# Altium PCB Mounting_PCB_A.PcbDoc
Units mil, origin at the board's own origin, x right, y up, seen from the top; angles counter-clockwise.
Board outline 6000 x 4000 mil, 4 copper layers (Top Layer, Mid-Layer 1, Mid-Layer 2, Bottom Layer); 44 components, 24 nets, 150 pads, 4 vias.
Unrouted connection lines stored in the file: 61.
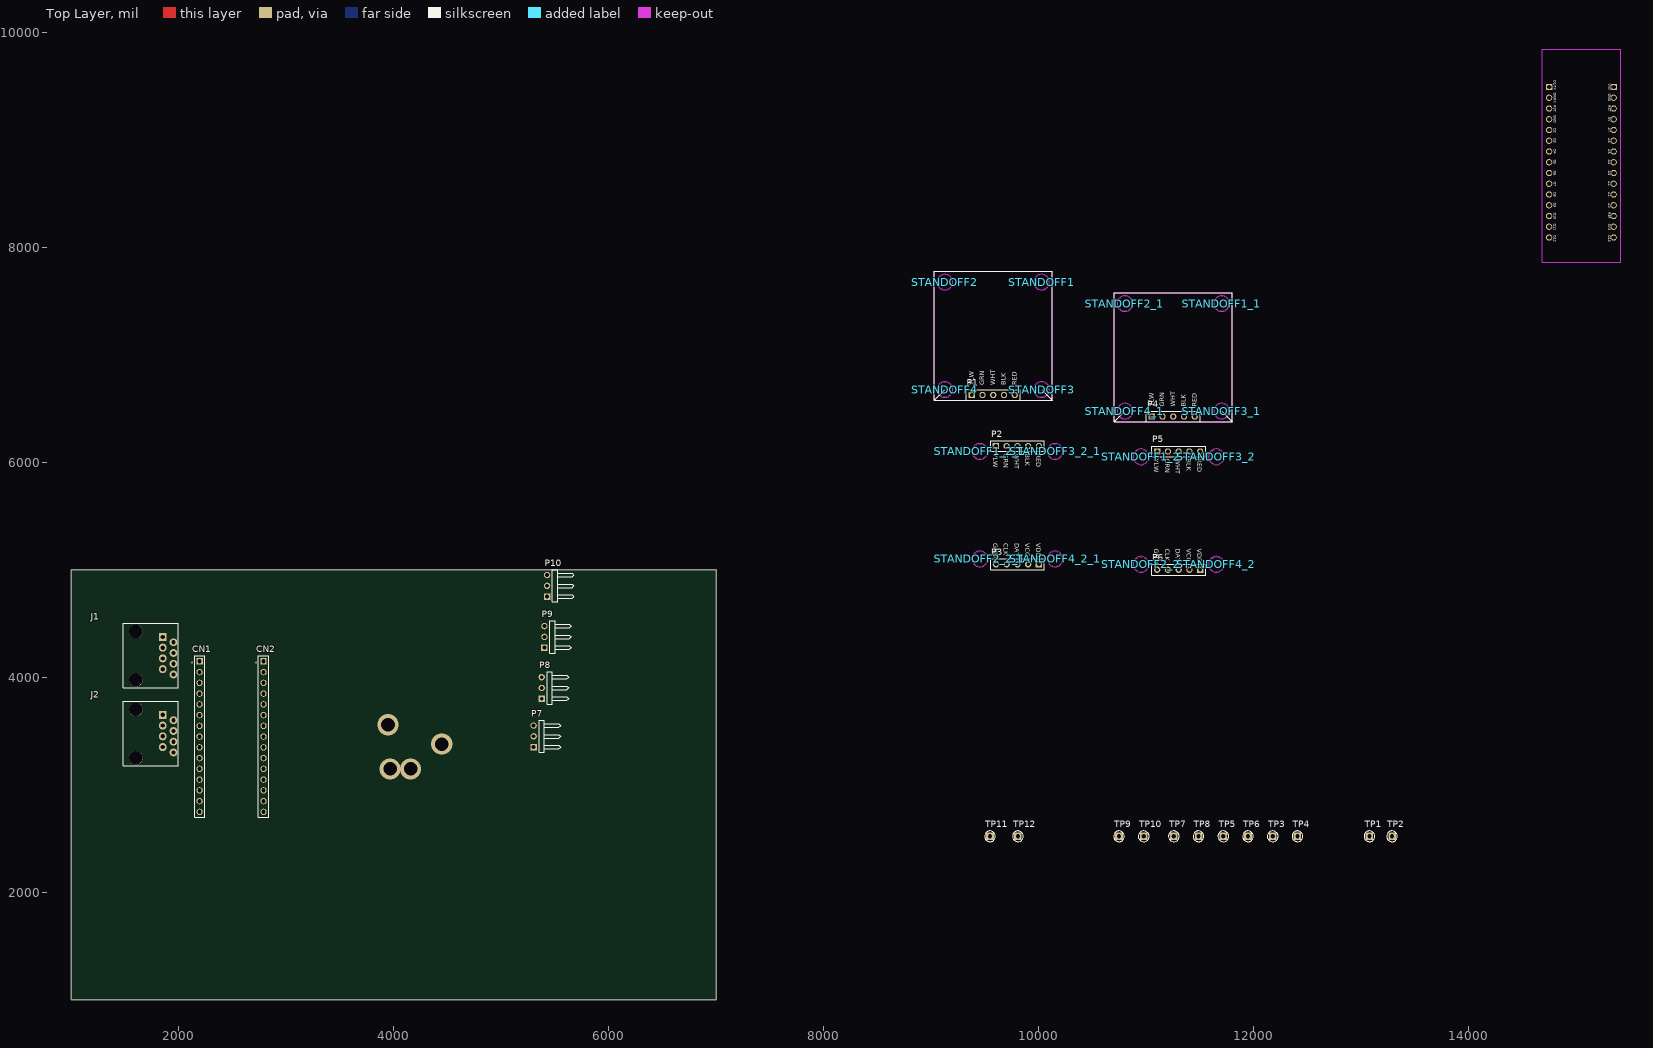
[diagram p0: Top Layer view]
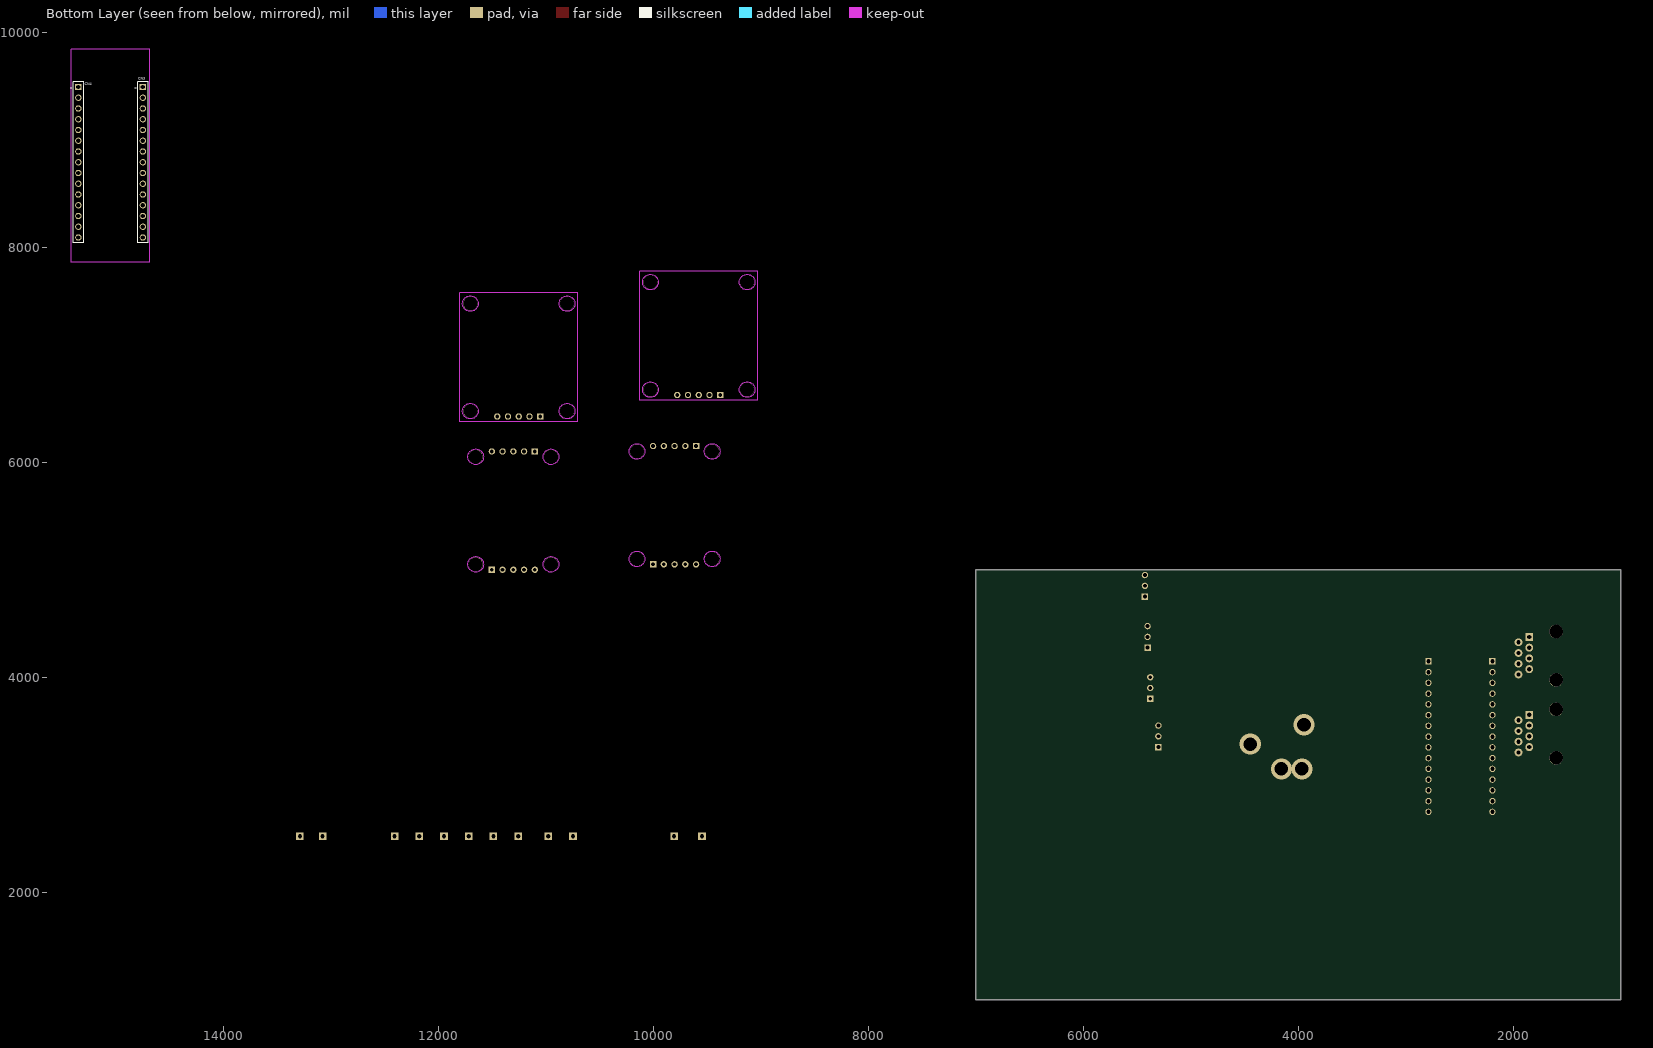
[diagram p1: Bottom Layer view, seen from below]

## Layer stack, top to bottom
Top Solder: solder mask 0.4, Solder Resist, Dk 3.5
Top Layer: signal copper 1.4
Dielectric 1: dielectric 12.6, FR-4, Dk 4.8
Mid-Layer 1: signal copper 1.4
Dielectric3: dielectric 12.6, FR-4, Dk 4.8
Mid-Layer 2: signal copper 1.4
Dielectric2: dielectric 12.6, FR-4, Dk 4.8
Bottom Layer: signal copper 1.4
Bottom Solder: solder mask 0.4, Solder Resist, Dk 3.5

## Board outline
1000,1000 7000,1000 7000,5000 1000,5000

## Design rules (kind name [scope] priority, off if disabled: settings)
Clearance [All] p1: gap=10
PolygonConnect [All] p1: connectstyle=Relief reliefconductorwidth=10 reliefentries=4 polygonreliefangle="90 Angle" airgapwidth=10
RoomDefinition Mounting_PCB_A [InComponentClass('Mounting_PCB_A')] p1: confinementstyle=ConfineIn formatcopy=TRUE lockcomponents=FALSE outline 7045,1060 14075,1060 14075,2680 7045,2680
RoutingVias [All] p1: holewidth=28 width=50 viastyle="Through Hole" minholewidth=28 minwidth=50 maxholewidth=28 maxwidth=50
SolderMaskExpansion [All] p1: expansion=4
Width [All] p1: maxlimit=10 minlimit=10 preferedwidth=10
30 further rules are at their usual default settings.

## Classes and differential pairs
component class Mounting_PCB_A: CN1 CN2 J1 J2 P1 P2 P3 P5 P7 P8 P9 P10 TP1 TP2 TP3 TP4 TP5 TP6 TP7 TP8 TP9 TP10 TP11 TP12

## Components (designator, comment, footprint, x,y, rotation, side; value= is the part's Value field where it differs from the comment)
CN1 "Header 15X1_male" HDR_1x15_2R54_V_F 2192.5,4147.44 r270 top
CN2 "Header 15X1_male" HDR_1x15_2R54_V_F 2787.5,4147.44 r270 top
CN3 "Header 15X1_male" HDR_1x15_2R54_V_F 14746,9490 r270 bottom locked
CN4 "Header 15X1_male" HDR_1x15_2R54_V_F 15346,9490 r270 bottom locked
J1 "RJ45-8" RJ45-8 1600,4200 r270 top
J2 "RJ45-8" RJ45-8 1600,3475 r270 top
P1 "Header 5" HDR1X5 9375,6625 r0 top
P2 "Header 5" HDR1X5 9600,6150 r0 top
P3 "Header 5" HDR1X5 10000,5050 r180 top
P4 "Header 5" HDR1X5 11050,6425 r0 top
P5 "Header 5" HDR1X5 11100,6100 r0 top
P6 "Header 5" HDR1X5 11500,5000 r180 top
P7 "Header 3H" HDR1X3H 5300,3350 r90 top
P8 "Header 3H" HDR1X3H 5375,3800 r90 top
P9 "Header 3H" HDR1X3H 5400,4275 r90 top
P10 "Header 3H" HDR1X3H 5425,4750 r90 top
STANDOFF1 "" STAND-OFF 10025,7675 r180 top
STANDOFF1_1 "" STAND-OFF 11700,7475 r180 top (schematic designator STANDOFF1)
STANDOFF1_2 "" STAND-OFF 10950,6050 r270 top (schematic designator STANDOFF1)
STANDOFF1_2_1 "" STAND-OFF 9450,6100 r270 top (schematic designator STANDOFF1)
STANDOFF2 "" STAND-OFF 9125,7675 r180 top
STANDOFF2_1 "" STAND-OFF 10800,7475 r180 top (schematic designator STANDOFF2)
STANDOFF2_2 "" STAND-OFF 10950,5050 r270 top (schematic designator STANDOFF2)
STANDOFF2_2_1 "" STAND-OFF 9450,5100 r270 top (schematic designator STANDOFF2)
STANDOFF3 "" STAND-OFF 10025,6675 r180 top
STANDOFF3_1 "" STAND-OFF 11700,6475 r180 top (schematic designator STANDOFF3)
STANDOFF3_2 "" STAND-OFF 11650,6050 r270 top (schematic designator STANDOFF3)
STANDOFF3_2_1 "" STAND-OFF 10150,6100 r270 top (schematic designator STANDOFF3)
STANDOFF4 "" STAND-OFF 9125,6675 r180 top
STANDOFF4_1 "" STAND-OFF 10800,6475 r180 top (schematic designator STANDOFF4)
STANDOFF4_2 "" STAND-OFF 11650,5050 r270 top (schematic designator STANDOFF4)
STANDOFF4_2_1 "" STAND-OFF 10150,5100 r270 top (schematic designator STANDOFF4)
TP1 "TESTPOINT" TP70 13075,2520 r0 top
TP2 "TESTPOINT" TP70 13285,2520 r0 top
TP3 "TESTPOINT" TP70 12175,2520 r0 top
TP4 "TESTPOINT" TP70 12405,2520 r0 top
TP5 "TESTPOINT" TP70 11715,2520 r0 top
TP6 "TESTPOINT" TP70 11945,2520 r0 top
TP7 "TESTPOINT" TP70 11255,2520 r0 top
TP8 "TESTPOINT" TP70 11485,2520 r0 top
TP9 "TESTPOINT" TP70 10745,2520 r0 top
TP10 "TESTPOINT" TP70 10975,2520 r90 top
TP11 "TESTPOINT" TP70 9545,2520 r90 top
TP12 "TESTPOINT" TP70 9805,2520 r90 top

## Footprints (in the part's own frame and the unit in brackets; to place one, negate y for a bottom-side part, rotate by r counter-clockwise, add the part's x,y. Pads: shape width x height; smd on the part's side, far side on the other; paste and mask are expansions set on the pad)
HDR1X3H [mm] "Connector; Header; 3 Position; Right Angle"
  rect 1.5x1.5 hole 0.9: 1(0,0)
  round 1.5 hole 0.9: 2(2.54,0) 3(5.08,0)
  silkscreen extent -1.27,-6.35 6.35,-1.27
HDR1X5 [mm] "Connector; Header; 5 Position"
  rect 1.5x1.5 hole 0.9: 1(0,0)
  round 1.5 hole 0.9: 2(2.54,0) 3(5.08,0) 4(7.62,0) 5(10.16,0)
  silkscreen extent -1.27,-1.27 11.43,1.27
HDR_1x15_2R54_V_F [mm] "Male Header, Pitch 2.54mm, 15x1 Position, Mated Height 6mm, Tail Length 3mm"
  rect 1.5x1.5 hole 1.02: 1(0,0)
  round 1.5 hole 1.02: 2(2.54,0) 3(5.08,0) 4(7.62,0) 5(10.16,0) 6(12.7,0) 7(15.24,0) 8(17.78,0) 9(20.32,0) 10(22.86,0) 11(25.4,0) 12(27.94,0) 13(30.48,0) 14(33.02,0) 15(35.56,0)
  silkscreen extent -1.27,-1.85 36.83,1.27, body extent -1.27,-1.27 36.83,1.27, height 12.7
RJ45-8 [mil]
  round 125.98 hole 125.98: 1(-225,0) 1(225,0)
  rect 74x74 hole 39.37: 1(-175,250)
  round 74 hole 39.37: 2(-125,350) 3(-75,250) 4(-25,350) 5(25,250) 6(75,350) 7(125,250) 8(175,350)
  silkscreen extent -300,-118 300,394
STAND-OFF [mil] "STAND-OFF"
  round 130 hole 130: 1(0,0)
  Top Layer keep-out lines w8: 0,73 ccw(c0,0) 0,-73 ccw(c0,0) 0,73
  Bottom Layer keep-out lines w8: 0,73 ccw(c0,0) 0,-73 ccw(c0,0) 0,73
TP70 [mil]
  rect 70x70 hole 40: 1(0,0)
  silkscreen extent -50,-50 50,50

## Part data
CN1 CN2 CN3 CN4: library part "Header 15X1_Female_1", "Header, 10-Pin, Single row,female"
P1 P2 P3 P4 P5 P6: "Header, 5-Pin"
P7 P8 P9 P10: "Header, 3-Pin, Right Angle"
STANDOFF1 STANDOFF1_1 STANDOFF1_2 STANDOFF1_2_1 STANDOFF2 STANDOFF2_1 STANDOFF2_2 STANDOFF2_2_1 STANDOFF3 STANDOFF3_1 STANDOFF3_2 STANDOFF3_2_1 STANDOFF4 STANDOFF4_1 STANDOFF4_2 STANDOFF4_2_1: library part STAND-OFF
TP1 TP2 TP3 TP4 TP5 TP6 TP7 TP8 TP9 TP10 TP11 TP12: "Test Point"

## Via types
v1: diameter 196.85, hole 125.98, Top Layer to Bottom Layer, 4 vias

## Nets (pads, with @x,y where several pads share a name; then routed paths per layer and width w, separated by ;. In a path a pad name is that pad's centre, name@x,y a point inside that pad or via, vN(x,y) a via of type N, cw(c..) or ccw(c..) an arc to the next point about the centre after c; other vN are vias at no path point)
+5V: CN2.4 J1.1 J1.2 J1.3 J2.1 J2.2 J2.3 P3.1 P3.2 P6.1 P6.2 P7.2 P8.2 P9.2 P10.2 TP1.1
ADC_A: P3.3 TP2.1
ADC_B: P6.3 TP4.1
ADC_C: CN2.9 P7.1 TP6.1
ADC_D: CN2.8 P8.1 TP8.1
ADC_E: CN2.7 P9.1 TP10.1
ADC_F: CN2.6 P10.1 TP12.1
BLK_B: P4.4 P5.4
BLK_T: P1.4 P2.4
CLK_B: P6.4
CLK_T: P3.4
GND: CN1.4 CN2.2 J1.6 J1.7 J1.8 J2.6 J2.7 J2.8 P3.5 P6.5 P7.3 P8.3 P9.3 P10.3 TP11.1
GRN_B: P4.2 P5.2
GRN_T: P1.2 P2.2
RED_B: P4.5 P5.5
RED_T: P1.5 P2.5
UART1_RX: CN1.2 J1.5 TP9.1
UART1_TX: CN1.1 J1.4 TP7.1
UART2_RX: CN2.10 J2.5 TP5.1
UART2_TX: CN2.5 J2.4 TP3.1
WHT_B: P4.3 P5.3
WHT_T: P1.3 P2.3
YLW_B: P4.1 P5.1
YLW_T: P1.1 P2.1
pads on no net: CN1.3 CN1.5 CN1.6 CN1.7 CN1.8 CN1.9 CN1.10 CN1.11 CN1.12 CN1.13 CN1.14 CN1.15 CN2.1 CN2.3 CN2.11 CN2.12 CN2.13 CN2.14 CN2.15 CN3.1 CN3.2 CN3.3 CN3.4 CN3.5 CN3.6 CN3.7 CN3.8 CN3.9 CN3.10 CN3.11 CN3.12 CN3.13 CN3.14 CN3.15 CN4.1 CN4.2 CN4.3 CN4.4 CN4.5 CN4.6 CN4.7 CN4.8 CN4.9 CN4.10 CN4.11 CN4.12 CN4.13 CN4.14 CN4.15 STANDOFF1.1 STANDOFF1_1.1 STANDOFF1_2.1 STANDOFF1_2_1.1 STANDOFF2.1 STANDOFF2_1.1 STANDOFF2_2.1 STANDOFF2_2_1.1 STANDOFF3.1 STANDOFF3_1.1 STANDOFF3_2.1 STANDOFF3_2_1.1 STANDOFF4.1 STANDOFF4_1.1 STANDOFF4_2.1 STANDOFF4_2_1.1
copper on no net:
  other v1: 3965,3147.68 4155,3147.68 4445,3377.68 3945,3557.68

## Keep-outs
Keep-Out Layer:
  lines w5: 14681,7860 14681,9840 15411,9840 15411,7860 14681,7860
  lines w8: 9025,6575 10125,6575 10125,7775 9025,7775 9025,6575 ; 10700,6375 10700,7575 11800,7575 11800,6375 10700,6375

## Silkscreen, mask and mechanical layers (free items; w line width, h text height)
Top Overlay:
  lines w10: 9125,6675 9025,6575 ; 9250,7775 9025,7775 ; 9900,7775 10125,7775 ; 10025,6675 10125,6575 ; 10800,6475 10700,6375 ; 10925,7575 10700,7575 ; 11575,7575 11800,7575 ; 11700,6475 11800,6375 ; 9025,6575 10125,6575 ; 9025,6575 9025,7775 ; 9025,7775 10125,7775 ; 10125,6575 10125,7775 ; 10700,6375 10700,7575 ; 10700,6375 11800,6375 ; 10700,7575 11800,7575 ; 11800,6375 11800,7575
  text "D1/TX" at 14781,9552 h40 r270
  text "VIN" at 15286,9521 h40 r270
  text "D0/RX" at 14782,9437 h40 r270
  text "GND" at 15286,9428 h40 r270
  text "RST" at 14780,9322 h40 r270
  text "RST" at 15286,9320 h40 r270
  text "GND" at 14780,9227 h40 r270
  text "5V" at 15286.44,9210.98 h40 r270
  text "A7" at 15286,9111 h40 r270
  text "D2" at 14780,9108 h40 r270
  text "D3" at 14780,9014 h40 r270
  text "A6" at 15286,9013 h40 r270
  text "D4" at 14780,8913 h40 r270
  text "A5" at 15286,8911 h40 r270
  text "A4" at 15286,8813 h40 r270
  text "D5" at 14780,8812 h40 r270
  text "A3" at 15286,8712 h40 r270
  text "D6" at 14780,8711 h40 r270
  text "A2" at 15286,8612 h40 r270
  text "D7" at 14780,8611 h40 r270
  text "D8" at 14780,8512 h40 r270
  text "A1" at 15286,8512 h40 r270
  text "D9" at 14780,8413 h40 r270
  text "A0" at 15286,8409 h40 r270
  text "REF" at 15286,8323 h40 r270
  text "D10" at 14780,8321 h40 r270
  text "3V3" at 15286,8220 h40 r270
  text "D11" at 14780,8219 h40 r270
  text "D12" at 14780,8109.74 h40 r270
  text "D13" at 15286,8110 h40 r270
  text "YLW" at 9392.49,6716.7 h42.5 r90
  text "GRN" at 9492.49,6716.7 h42.5 r90
  text "WHT" at 9592.49,6716.7 h42.5 r90
  text "BLK" at 9692.49,6716.7 h42.5 r90
  text "RED" at 9792.49,6716.7 h42.5 r90
  text "YLW" at 11067.49,6516.7 h42.5 r90
  text "GRN" at 11167.49,6516.7 h42.5 r90
  text "WHT" at 11267.49,6516.7 h42.5 r90
  text "BLK" at 11367.49,6516.7 h42.5 r90
  text "RED" at 11467.49,6516.7 h42.5 r90
  text "YLW" at 9575,6080 h42.5 r270
  text "GRN" at 9675,6080 h42.5 r270
  text "WHT" at 9775,6080 h42.5 r270
  text "BLK" at 9875,6080 h42.5 r270
  text "RED" at 9975,6080 h42.5 r270
  text "YLW" at 11075,6030 h42.5 r270
  text "GRN" at 11175,6030 h42.5 r270
  text "WHT" at 11275,6030 h42.5 r270
  text "BLK" at 11375,6030 h42.5 r270
  text "RED" at 11475,6030 h42.5 r270
  text "GND" at 9575,5245 h42.5 r270
  text "CLK" at 9675,5245 h42.5 r270
  text "DAT" at 9775,5245 h42.5 r270
  text "VCC" at 9875,5245 h42.5 r270
  text "VDD" at 9975,5245 h42.5 r270
  text "GND" at 11075,5195 h42.5 r270
  text "CLK" at 11175,5195 h42.5 r270
  text "DAT" at 11275,5195 h42.5 r270
  text "VCC" at 11375,5195 h42.5 r270
  text "VDD" at 11475,5195 h42.5 r270
Mechanical 1:
  lines w8: 9025,6575 10125,6575 10125,7775 9025,7775 9025,6575 ; 9350,5000 9350,6200 10250,6200 10250,5000 9350,5000 ; 10700,6375 10700,7575 11800,7575 11800,6375 10700,6375 ; 10850,4950 11750,4950 11750,6150 10850,6150 10850,4950
Drill Drawing:
  lines w5: 2125,2520 2125,4500 2855,4500 2855,2520 2125,2520